# Altium PCB pcb.PcbDoc (part 1 of 2)
Units mm, origin at the board's own origin, x right, y up, seen from the top; angles counter-clockwise.
Board outline 343 x 129 mm, 4 copper layers (Top Layer, Layer 1 3V3, Layer 2 GND, Bottom Layer), stack 1.564 mm thick; 191 components, 119 nets, 712 pads, 390 vias.
Unrouted connection lines stored in the file: 301.
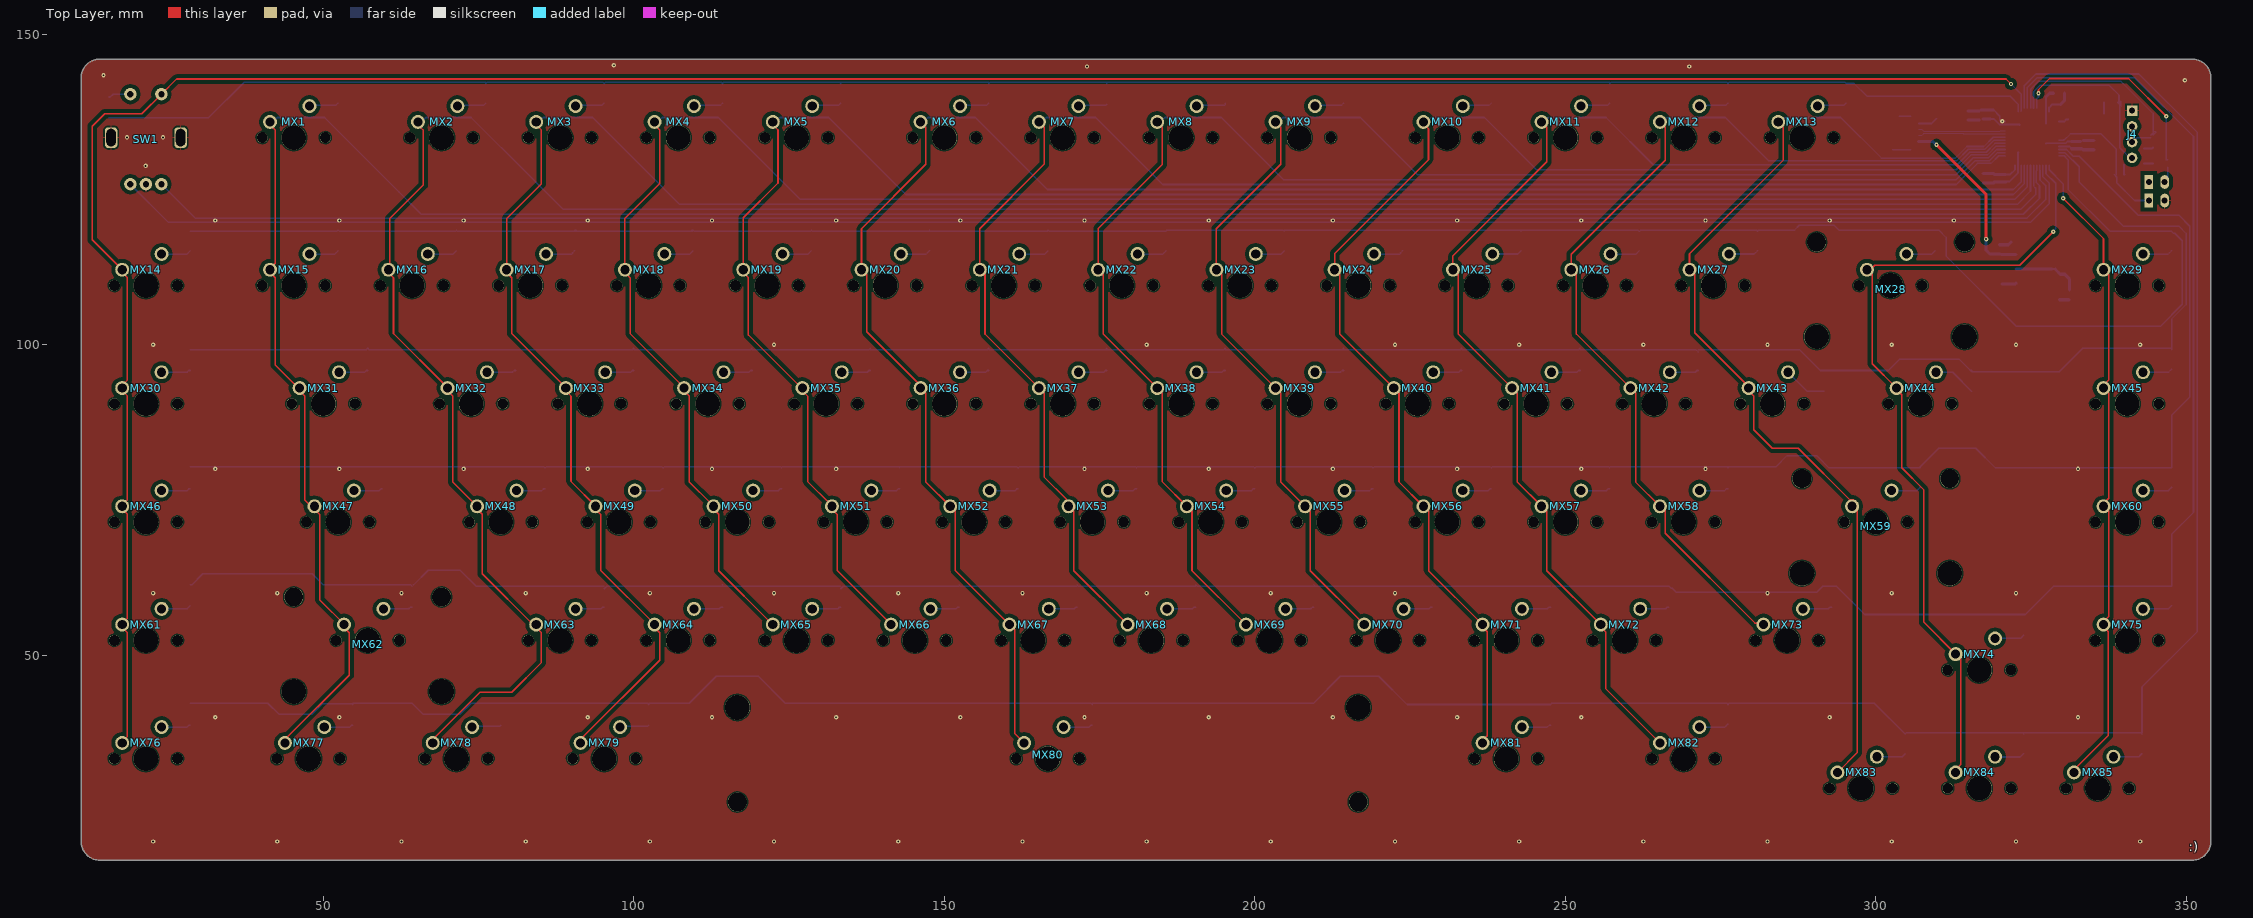
[diagram p0: Top Layer view]
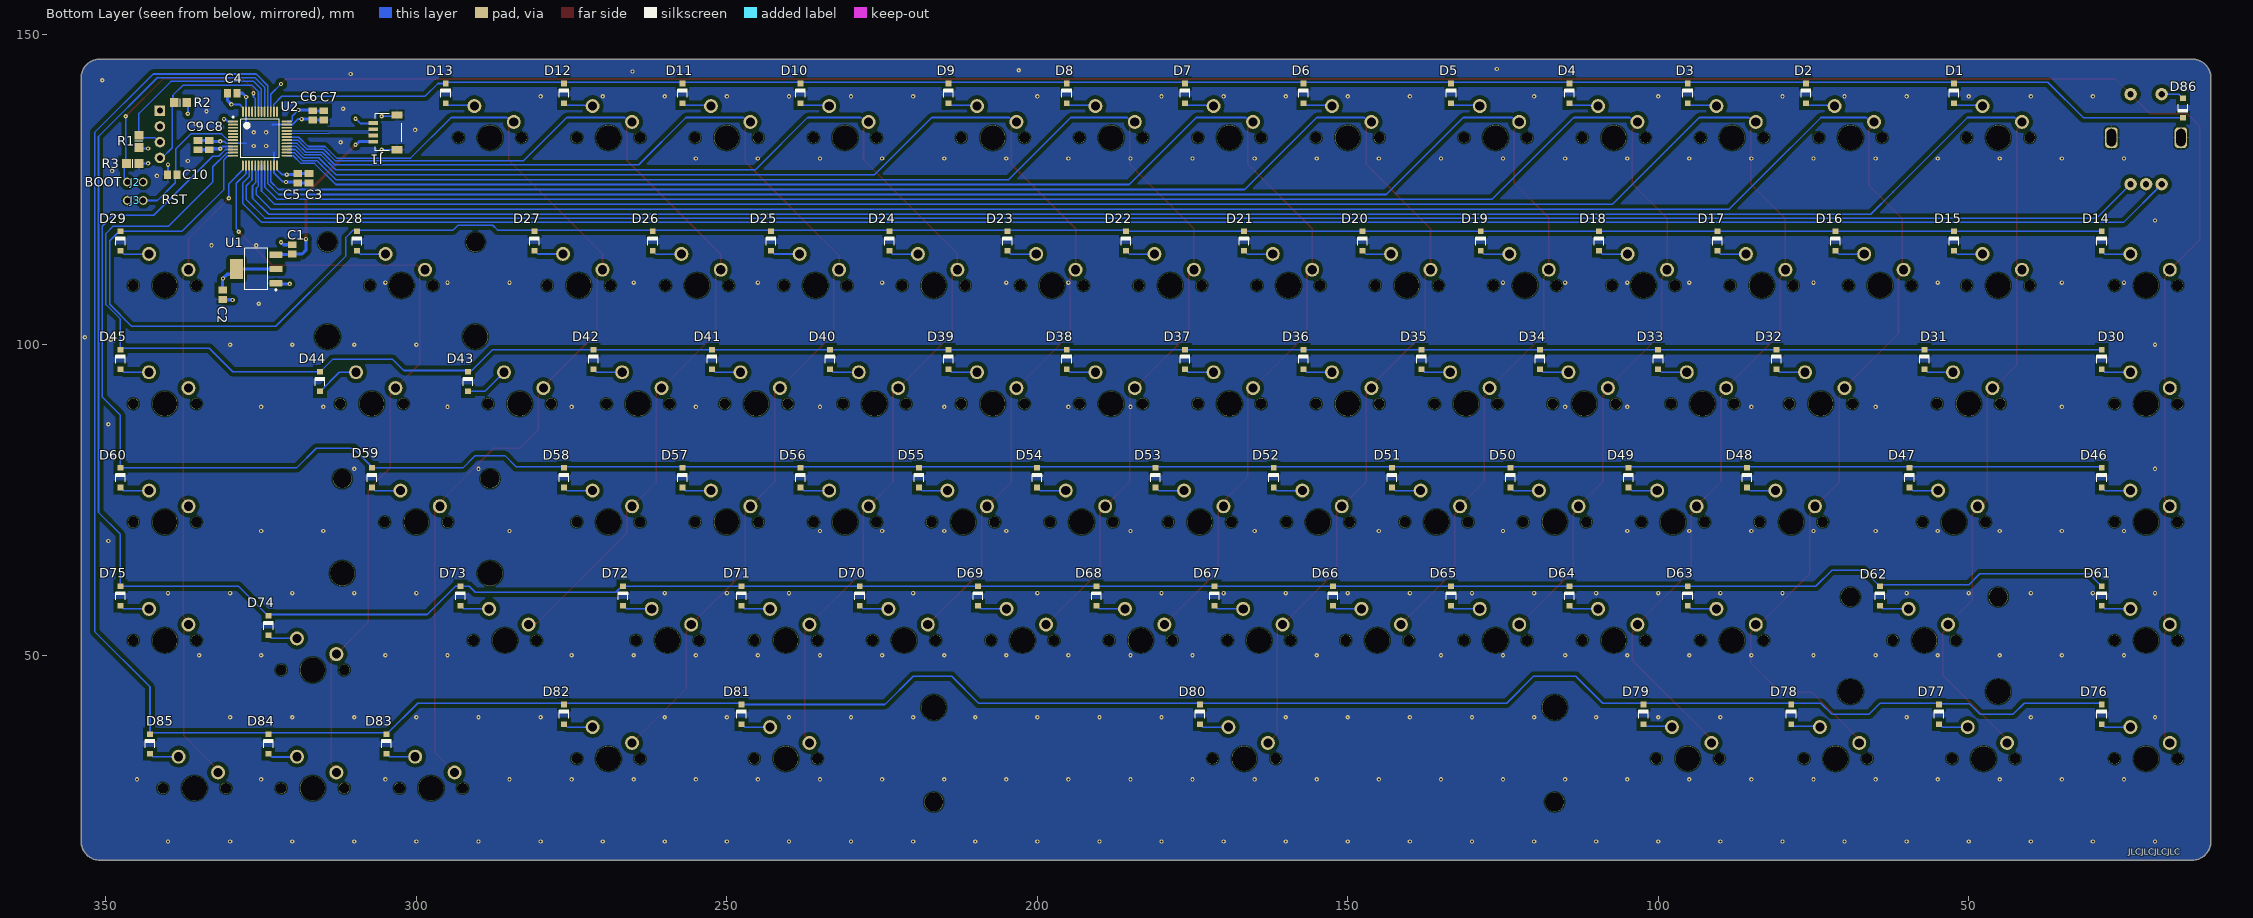
[diagram p1: Bottom Layer view, seen from below]
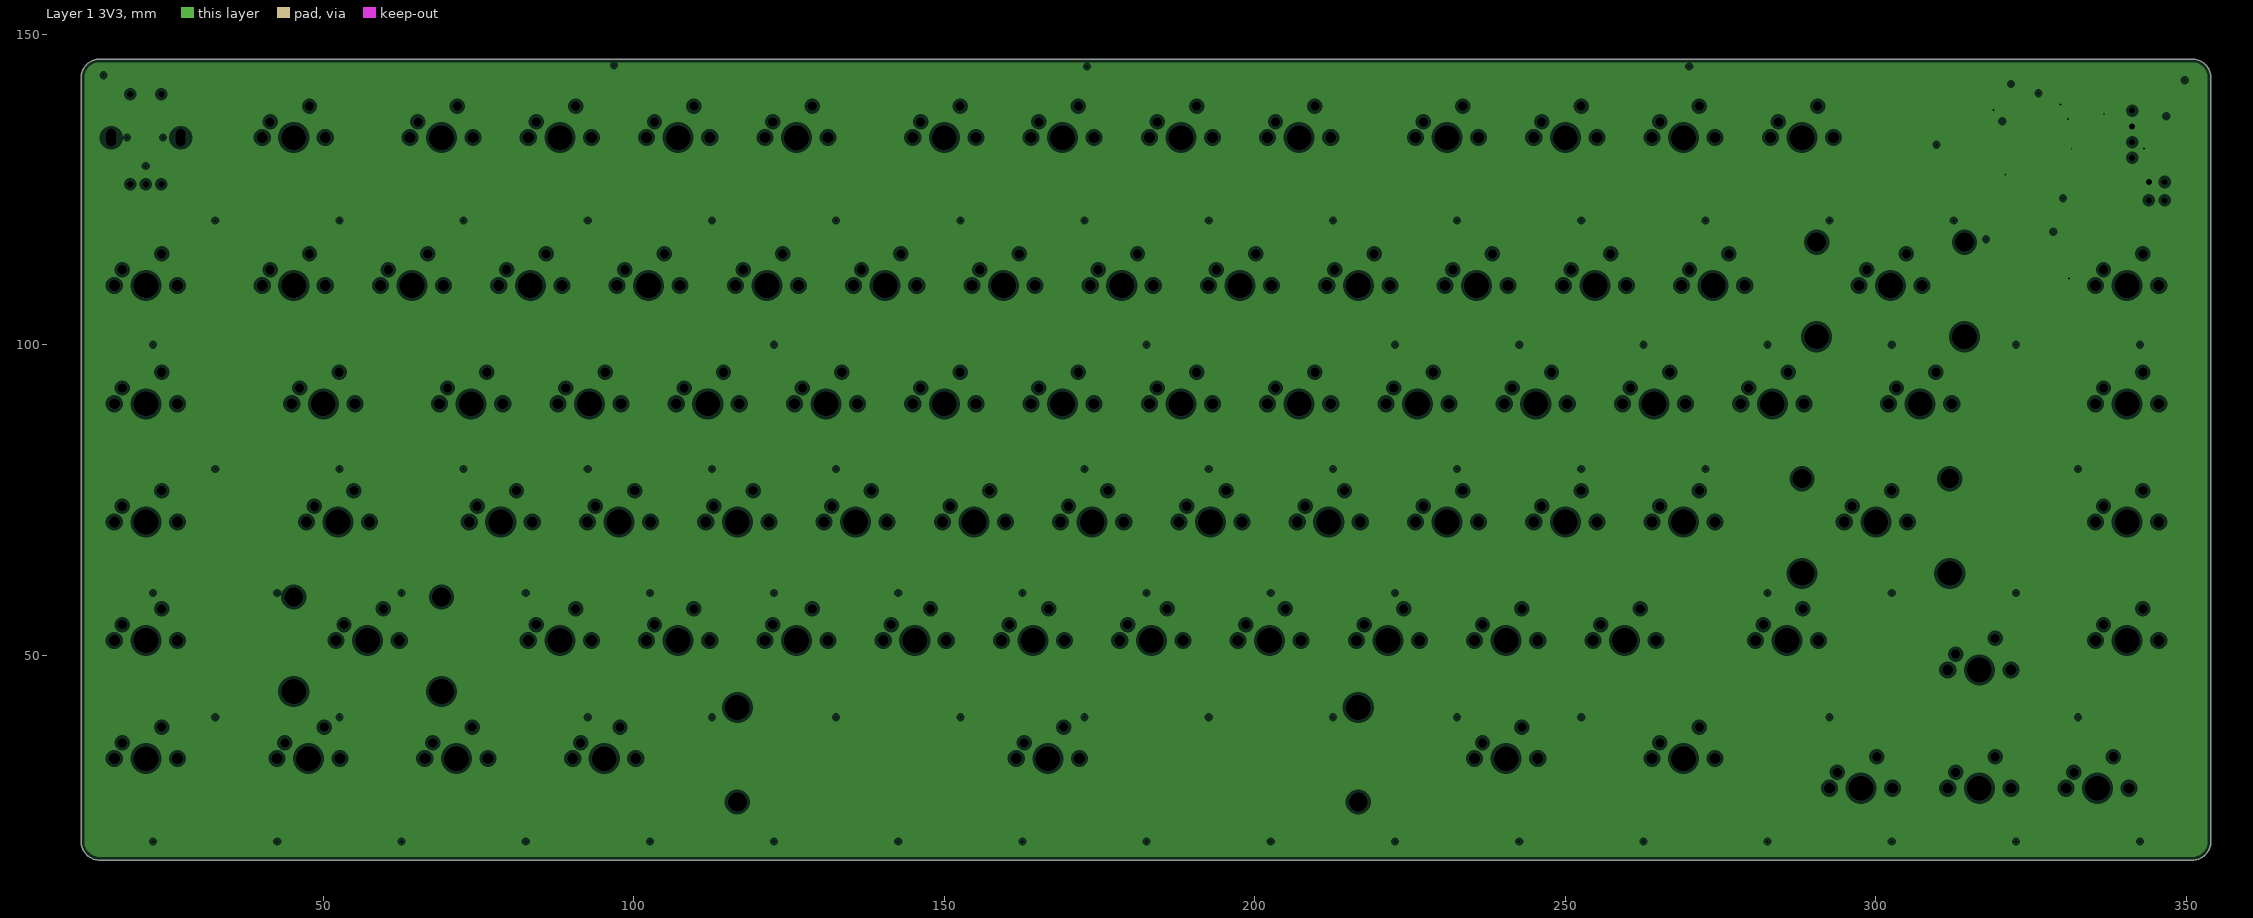
[diagram p2: Layer 1 3V3, clearances drawn from the general rule]
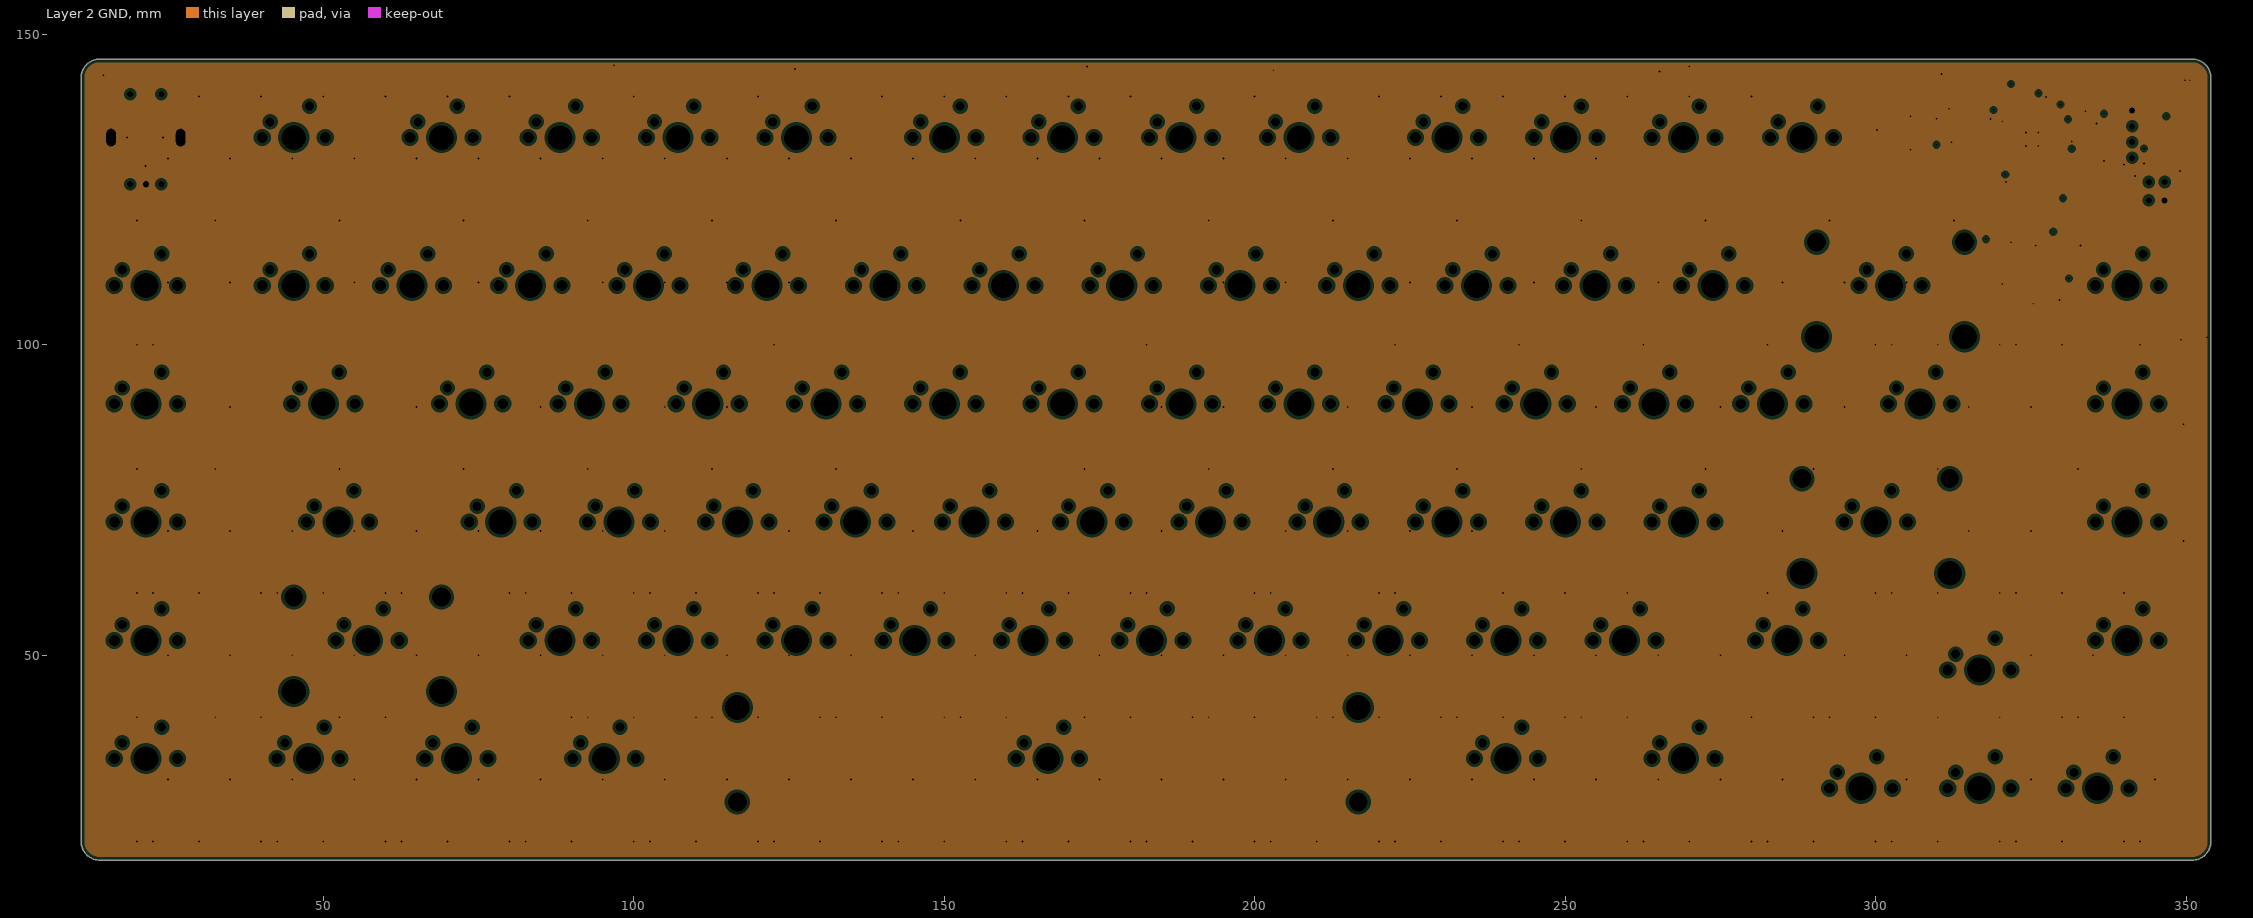
[diagram p3: Layer 2 GND, clearances drawn from the general rule]

## Layer stack, top to bottom
Top Solder: solder mask 0.0102, Solder Resist, Dk 3.5
Top Layer: signal copper 0.035
Dielectric 2: prepreg 0.0994, PP-006, Dk 4.1
Layer 1 3V3: plane copper 0.0152, net +3V3
Dielectric 1: dielectric 1.265, FR-4, Dk 4.8
Layer 2 GND: plane copper 0.0152, net GND
Dielectric 3: prepreg 0.0994, PP-006, Dk 4.1
Bottom Layer: signal copper 0.035
Bottom Solder: solder mask 0.0102, Solder Resist, Dk 3.5

## Board outline
11,20 11,143 cw(c14,143) 14,146 351,146 cw(c351,143) 354,143 354,20 cw(c351,20) 351,17 14,17 cw(c14,20)

## Design rules (kind name [scope] priority, off if disabled: settings)
Clearance "Stitching GND" [IsStitchingVia and InNet('GND') vs (IsVia and (Not IsStitchingVia)) Or IsPad] p1: gap=0.6 ignorepadtopadclearanceinfootprint=FALSE
Clearance Clearance_1 [InNet('USB D_N') vs InNet('USB D_P')] p2: gap=0.1 ignorepadtopadclearanceinfootprint=TRUE
Clearance [All] p3: gap=0.2 ignorepadtopadclearanceinfootprint=TRUE except(0.6: Arc-Fill Arc-Poly Arc-Region Track-Fill Track-Poly Track-Region SMDPad-Fill SMDPad-Poly SMDPad-Region THPad-Fill THPad-Poly THPad-Region Via-Fill Via-Poly Via-Region Fill-Fill Fill-Poly Fill-Region Poly-Poly Poly-Region Region-Region)
ComponentClearance "switch clearance" [(HasFootprint('MXOnly-1U - duplicate') AND HasFootprint('MXOnly-1.25U - duplicate') AND HasFootprint('MXOnly-1.5U - duplicate') AND HasFootprint('MXOnly-1.75U - duplicate') AND HasFootprint('MXOnly-2U - duplicate') AND HasFootprint('MXOnly-2.25U - duplicate') AND HasFootprint('MXOnly-6.25U-ReversedStabilizers - duplicate'))] p1: gap=0 collisioncheckmode=3 verticalgap=0 showdistances=FALSE
ComponentClearance [InComponentClass('Root')] p2: gap=0.254 collisioncheckmode=3 verticalgap=0.254 showdistances=FALSE
DiffPairsRouting [All] p1: maxlimit=0.2 minlimit=0.2 mostfreqgap=0.2 toplayer_minwidth=0.155 toplayer_maxwidth=0.155 toplayer_prefwidth=0.155 bottomlayer_minwidth=0.155 bottomlayer_maxwidth=0.155 bottomlayer_prefwidth=0.155 impedanceprofiledriven=TRUE impedanceprofileid={9E6898E2-0004-47E7-917E-862358624599} impedanceprofilevalue=90.000000 maxuncoupledlength=12.7
HoleSize [All] p1: absolutevalues=TRUE maxlimit=5 minlimit=0.025 maxpercent=80.000 minpercent=20.000
MinimumSolderMaskSliver [All] p1: minsoldermaskwidth=0.13
PlaneClearance [All] p1: clearance=0.508
PlaneConnect [All] p1: pad.planeconnectstyle=Relief pad.reliefexpansion=0.508 pad.reliefentries=4 pad.reliefconductorwidth=0.254 pad.reliefairgap=0.254 via.planeconnectstyle=Direct via.reliefexpansion=0.508 via.reliefentries=4 via.reliefconductorwidth=0.254 via.reliefairgap=0.254
PolygonConnect [All] p1: thpad.connectstyle=Relief thpad.reliefconductorwidth=0.254 thpad.reliefentries=4 thpad.polygonreliefangle="90 Angle" thpad.airgapwidth=0.254 smdpad.connectstyle=Relief smdpad.reliefconductorwidth=0.254 smdpad.reliefentries=4 smdpad.polygonreliefangle="90 Angle" smdpad.airgapwidth=0.254 via.connectstyle=Direct via.reliefconductorwidth=0.254 via.reliefentries=4 via.polygonreliefangle="90 Angle" via.airgapwidth=0.254
RoutingVias [All] p1: holewidth=0.3 width=0.7 viastyle="Through Hole" minholewidth=0.3 minwidth=0.7 maxholewidth=0.3 maxwidth=0.7
SilkToSolderMaskClearance [IsPad] p1: minsilkscreentomaskgap=0.13 clearancetoexposedcopper=TRUE
SolderMaskExpansion viastent [IsVia] p1: expansion=0.102 istentingtop=TRUE
SolderMaskExpansion [All] p2: expansion=0.102 istentingtop=FALSE
SupplyNets "Schematic Supply Nets_2" [InNet('GND')] p1: voltage=0.000
SupplyNets "Schematic Supply Nets_1" [InNet('+3V3')] p2: voltage=0.000
SupplyNets "Schematic Supply Nets" [InNet('+5')] p3: voltage=0.000
Width USB [(InNet('NetJ1_2') OR InNet('NetJ1_3'))] p1: maxlimit=0.165 minlimit=0.165 preferedwidth=0.165 minimp=50.000000 maximp=50.000000 favimp=50.000000
Width 5V [InNet('+5')] p2: maxlimit=0.5 minlimit=0.3 preferedwidth=0.3 minimp=50.000000 maximp=50.000000 favimp=50.000000
Width 3V3 [InNet('+3V3')] p3: maxlimit=0.5 minlimit=0.3 preferedwidth=0.3 minimp=50.000000 maximp=50.000000 favimp=50.000000
Width GND [InNet('GND')] p4: maxlimit=0.5 minlimit=0.3 preferedwidth=0.3 minimp=50.000000 maximp=50.000000 favimp=50.000000
Width [All] p5: maxlimit=0.254 minlimit=0.254 preferedwidth=0.254
23 further rules are at their usual default settings.

## Classes and differential pairs
component class Root: C1 C2 C3 C4 C5 C6 C7 C8 C9 C10 J1 J2 J3 J4 R1 R2 R3 U1 U2
component class Matrix: D1 D2 D3 D4 D5 D6 D7 D8 D9 D10 D11 D12 D13 D14 D15 D16 D17 D18 D19 D20 D21 D22 D23 D24 D25 D26 D27 D28 D29 D30 D31 D32 D33 D34 D35 D36 D37 D38 D39 D40 D41 D42 D43 D44 D45 D46 D47 D48 D49 D50 D51 D52 D53 D54 D55 D56 D57 D58 D59 D60 D61 D62 D63 D64 D65 D66 D67 D68 D69 D70 D71 D72 D73 D74 D75 D76 D77 D78 D79 D80 D81 D82 D83 D84 D85 D86 MX1 MX2 MX3 MX4 MX5 MX6 MX7 MX8 MX9 MX10 MX11 MX12 MX13 MX14 MX15 MX16 MX17 MX18 MX19 MX20 MX21 MX22 MX23 MX24 MX25 MX26 MX27 MX28 MX29 MX30 MX31 MX32 MX33 MX34 MX35 MX36 MX37 MX38 MX39 MX40 MX41 MX42 MX43 MX44 MX45 MX46 MX47 MX48 MX49 MX50 MX51 MX52 MX53 MX54 MX55 MX56 MX57 MX58 MX59 MX60 MX61 MX62 MX63 MX64 MX65 MX66 MX67 MX68 MX69 MX70 MX71 MX72 MX73 MX74 MX75 MX76 MX77 MX78 MX79 MX80 MX81 MX82 MX83 MX84 MX85 SW1
differential pair "USB D": +"USB D_P" -"USB D_N"

## Components (designator, comment, footprint, x,y, rotation, side; value= is the part's Value field where it differs from the comment)
C1 "Cap" C0805 320,115.35 r270 bottom value=1uF
C2 "Cap" C0805 331.2,108.05 r90 bottom value=1uF
C3 "Cap" C0805 317.301,126.801 r90 bottom value=4.7uF
C4 "Cap" C0805 329.648,140.494 r0 bottom value=100nF
C5 "Cap" C0805 319.087,126.801 r90 bottom value=100nF
C6 "Cap" C0805 316.706,136.922 r90 bottom value=100nF
C7 "Cap" C0805 314.92,136.922 r90 bottom value=4.7uF
C8 "Cap" C0805 333.375,132.159 r270 bottom value=10nF
C9 "Cap" C0805 335.161,132.159 r270 bottom value=1uF
C10 "Cap" C0805 339.328,127.397 r180 bottom value=100nF
D1 "1N4148W-7-F" DIOD-SOD123-2_V 52.387,140.494 r90 bottom
D2 "1N4148W-7-F" DIOD-SOD123-2_V 76.2,140.494 r90 bottom
D3 "1N4148W-7-F" DIOD-SOD123-2_V 95.25,140.494 r90 bottom
D4 "1N4148W-7-F" DIOD-SOD123-2_V 114.3,140.494 r90 bottom
D5 "1N4148W-7-F" DIOD-SOD123-2_V 133.35,140.494 r90 bottom
D6 "1N4148W-7-F" DIOD-SOD123-2_V 157.162,140.494 r90 bottom
D7 "1N4148W-7-F" DIOD-SOD123-2_V 176.213,140.494 r90 bottom
D8 "1N4148W-7-F" DIOD-SOD123-2_V 195.262,140.494 r90 bottom
D9 "1N4148W-7-F" DIOD-SOD123-2_V 214.312,140.494 r90 bottom
D10 "1N4148W-7-F" DIOD-SOD123-2_V 238.125,140.494 r90 bottom
D11 "1N4148W-7-F" DIOD-SOD123-2_V 257.175,140.494 r90 bottom
D12 "1N4148W-7-F" DIOD-SOD123-2_V 276.225,140.494 r90 bottom
D13 "1N4148W-7-F" DIOD-SOD123-2_V 295.275,140.494 r90 bottom
D14 "1N4148W-7-F" DIOD-SOD123-2_V 28.575,116.681 r90 bottom
D15 "1N4148W-7-F" DIOD-SOD123-2_V 52.387,116.681 r90 bottom
D16 "1N4148W-7-F" DIOD-SOD123-2_V 71.438,116.681 r90 bottom
D17 "1N4148W-7-F" DIOD-SOD123-2_V 90.487,116.681 r90 bottom
D18 "1N4148W-7-F" DIOD-SOD123-2_V 109.537,116.681 r90 bottom
D19 "1N4148W-7-F" DIOD-SOD123-2_V 128.588,116.681 r90 bottom
D20 "1N4148W-7-F" DIOD-SOD123-2_V 147.637,116.681 r90 bottom
D21 "1N4148W-7-F" DIOD-SOD123-2_V 166.688,116.681 r90 bottom
D22 "1N4148W-7-F" DIOD-SOD123-2_V 185.737,116.681 r90 bottom
D23 "1N4148W-7-F" DIOD-SOD123-2_V 204.787,116.681 r90 bottom
D24 "1N4148W-7-F" DIOD-SOD123-2_V 223.837,116.681 r90 bottom
D25 "1N4148W-7-F" DIOD-SOD123-2_V 242.887,116.681 r90 bottom
D26 "1N4148W-7-F" DIOD-SOD123-2_V 261.938,116.681 r90 bottom
D27 "1N4148W-7-F" DIOD-SOD123-2_V 280.988,116.681 r90 bottom
D28 "1N4148W-7-F" DIOD-SOD123-2_V 309.562,116.681 r90 bottom
D29 "1N4148W-7-F" DIOD-SOD123-2_V 347.662,116.681 r90 bottom
D30 "1N4148W-7-F" DIOD-SOD123-2_V 28.575,97.631 r90 bottom
D31 "1N4148W-7-F" DIOD-SOD123-2_V 57.15,97.631 r90 bottom
D32 "1N4148W-7-F" DIOD-SOD123-2_V 80.962,97.631 r90 bottom
D33 "1N4148W-7-F" DIOD-SOD123-2_V 100.013,97.631 r90 bottom
D34 "1N4148W-7-F" DIOD-SOD123-2_V 119.062,97.631 r90 bottom
D35 "1N4148W-7-F" DIOD-SOD123-2_V 138.112,97.631 r90 bottom
D36 "1N4148W-7-F" DIOD-SOD123-2_V 157.162,97.631 r90 bottom
D37 "1N4148W-7-F" DIOD-SOD123-2_V 176.213,97.631 r90 bottom
D38 "1N4148W-7-F" DIOD-SOD123-2_V 195.262,97.631 r90 bottom
D39 "1N4148W-7-F" DIOD-SOD123-2_V 214.312,97.631 r90 bottom
D40 "1N4148W-7-F" DIOD-SOD123-2_V 233.362,97.631 r90 bottom
D41 "1N4148W-7-F" DIOD-SOD123-2_V 252.412,97.631 r90 bottom
D42 "1N4148W-7-F" DIOD-SOD123-2_V 271.462,97.631 r90 bottom
D43 "1N4148W-7-F" DIOD-SOD123-2_V 291.703,94.059 r90 bottom
D44 "1N4148W-7-F" DIOD-SOD123-2_V 315.516,94.059 r90 bottom
D45 "1N4148W-7-F" DIOD-SOD123-2_V 347.662,97.631 r90 bottom
D46 "1N4148W-7-F" DIOD-SOD123-2_V 28.575,78.581 r90 bottom
D47 "1N4148W-7-F" DIOD-SOD123-2_V 59.531,78.581 r90 bottom
D48 "1N4148W-7-F" DIOD-SOD123-2_V 85.725,78.581 r90 bottom
D49 "1N4148W-7-F" DIOD-SOD123-2_V 104.775,78.581 r90 bottom
D50 "1N4148W-7-F" DIOD-SOD123-2_V 123.825,78.581 r90 bottom
D51 "1N4148W-7-F" DIOD-SOD123-2_V 142.875,78.581 r90 bottom
D52 "1N4148W-7-F" DIOD-SOD123-2_V 161.925,78.581 r90 bottom
D53 "1N4148W-7-F" DIOD-SOD123-2_V 180.975,78.581 r90 bottom
D54 "1N4148W-7-F" DIOD-SOD123-2_V 200.025,78.581 r90 bottom
D55 "1N4148W-7-F" DIOD-SOD123-2_V 219.075,78.581 r90 bottom
D56 "1N4148W-7-F" DIOD-SOD123-2_V 238.125,78.581 r90 bottom
D57 "1N4148W-7-F" DIOD-SOD123-2_V 257.175,78.581 r90 bottom
D58 "1N4148W-7-F" DIOD-SOD123-2_V 276.225,78.581 r90 bottom
D59 "1N4148W-7-F" DIOD-SOD123-2_V 307.181,78.581 r90 bottom
D60 "1N4148W-7-F" DIOD-SOD123-2_V 347.662,78.581 r90 bottom
D61 "1N4148W-7-F" DIOD-SOD123-2_V 28.575,59.531 r90 bottom
D62 "1N4148W-7-F" DIOD-SOD123-2_V 64.294,59.531 r90 bottom
D63 "1N4148W-7-F" DIOD-SOD123-2_V 95.25,59.531 r90 bottom
D64 "1N4148W-7-F" DIOD-SOD123-2_V 114.3,59.531 r90 bottom
D65 "1N4148W-7-F" DIOD-SOD123-2_V 133.35,59.531 r90 bottom
D66 "1N4148W-7-F" DIOD-SOD123-2_V 152.4,59.531 r90 bottom
D67 "1N4148W-7-F" DIOD-SOD123-2_V 171.45,59.531 r90 bottom
D68 "1N4148W-7-F" DIOD-SOD123-2_V 190.5,59.531 r90 bottom
D69 "1N4148W-7-F" DIOD-SOD123-2_V 209.55,59.531 r90 bottom
D70 "1N4148W-7-F" DIOD-SOD123-2_V 228.6,59.531 r90 bottom
D71 "1N4148W-7-F" DIOD-SOD123-2_V 247.65,59.531 r90 bottom
D72 "1N4148W-7-F" DIOD-SOD123-2_V 266.7,59.531 r90 bottom
D73 "1N4148W-7-F" DIOD-SOD123-2_V 292.894,59.531 r90 bottom
D74 "1N4148W-7-F" DIOD-SOD123-2_V 323.85,54.769 r90 bottom
D75 "1N4148W-7-F" DIOD-SOD123-2_V 347.662,59.531 r90 bottom
D76 "1N4148W-7-F" DIOD-SOD123-2_V 28.575,40.481 r90 bottom
D77 "1N4148W-7-F" DIOD-SOD123-2_V 54.769,40.481 r90 bottom
D78 "1N4148W-7-F" DIOD-SOD123-2_V 78.581,40.481 r90 bottom
D79 "1N4148W-7-F" DIOD-SOD123-2_V 102.394,40.481 r90 bottom
D80 "1N4148W-7-F" DIOD-SOD123-2_V 173.831,40.481 r90 bottom
D81 "1N4148W-7-F" DIOD-SOD123-2_V 247.65,40.481 r90 bottom
D82 "1N4148W-7-F" DIOD-SOD123-2_V 276.225,40.481 r90 bottom
D83 "1N4148W-7-F" DIOD-SOD123-2_V 304.8,35.719 r90 bottom
D84 "1N4148W-7-F" DIOD-SOD123-2_V 323.85,35.719 r90 bottom
D85 "1N4148W-7-F" DIOD-SOD123-2_V 342.9,35.719 r90 bottom
D86 "1N4148W-7-F" DIOD-SOD123-2_V 15.478,138.112 r270 bottom
J1 "SM04B-SRSS-TB" JST-SR-4 302.2,134.2 r90 bottom
J2 "BOOT" HDR_F_1X2 345.281,126.206 r0 bottom value=HDRF2
J3 "RST" HDR_F_1X2 345.281,123.23 r0 bottom value=HDRF2
J4 "OLED" SSD1306-0.91-OLED-4PIN-128X32 304.8,139.898 r0 top locked
MX1 "ESC" "MXOnly-1U - duplicate" 45.244,133.35 r0 top value=MX-NoLED
MX2 "F1" "MXOnly-1U - duplicate" 69.056,133.35 r0 top value=MX-NoLED
MX3 "F2" "MXOnly-1U - duplicate" 88.106,133.35 r0 top value=MX-NoLED
MX4 "F3" "MXOnly-1U - duplicate" 107.156,133.35 r0 top value=MX-NoLED
MX5 "F4" "MXOnly-1U - duplicate" 126.206,133.35 r0 top value=MX-NoLED
MX6 "F5" "MXOnly-1U - duplicate" 150.019,133.35 r0 top value=MX-NoLED
MX7 "F6" "MXOnly-1U - duplicate" 169.069,133.35 r0 top value=MX-NoLED
MX8 "F7" "MXOnly-1U - duplicate" 188.119,133.35 r0 top value=MX-NoLED
MX9 "F8" "MXOnly-1U - duplicate" 207.169,133.35 r0 top value=MX-NoLED
MX10 "F9" "MXOnly-1U - duplicate" 230.981,133.35 r0 top value=MX-NoLED
MX11 "F10" "MXOnly-1U - duplicate" 250.031,133.35 r0 top value=MX-NoLED
MX12 "F11" "MXOnly-1U - duplicate" 269.081,133.35 r0 top value=MX-NoLED
MX13 "F12" "MXOnly-1U - duplicate" 288.131,133.35 r0 top value=MX-NoLED
MX14 "MAC1" "MXOnly-1U - duplicate" 21.431,109.537 r0 top value=MX-NoLED
MX15 "~" "MXOnly-1U - duplicate" 45.244,109.537 r0 top value=MX-NoLED
MX16 "1" "MXOnly-1U - duplicate" 64.294,109.537 r0 top value=MX-NoLED
MX17 "2" "MXOnly-1U - duplicate" 83.344,109.537 r0 top value=MX-NoLED
MX18 "3" "MXOnly-1U - duplicate" 102.394,109.537 r0 top value=MX-NoLED
MX19 "4" "MXOnly-1U - duplicate" 121.444,109.537 r0 top value=MX-NoLED
MX20 "5" "MXOnly-1U - duplicate" 140.494,109.537 r0 top value=MX-NoLED
MX21 "6" "MXOnly-1U - duplicate" 159.544,109.537 r0 top value=MX-NoLED
MX22 "7" "MXOnly-1U - duplicate" 178.594,109.537 r0 top value=MX-NoLED
MX23 "8" "MXOnly-1U - duplicate" 197.644,109.537 r0 top value=MX-NoLED
MX24 "9" "MXOnly-1U - duplicate" 216.694,109.537 r0 top value=MX-NoLED
MX25 "0" "MXOnly-1U - duplicate" 235.744,109.537 r0 top value=MX-NoLED
MX26 "-" "MXOnly-1U - duplicate" 254.794,109.537 r0 top value=MX-NoLED
MX27 "" "MXOnly-1U - duplicate" 273.844,109.537 r0 top value=MX-NoLED
MX28 "BACK" "MXOnly-2U - duplicate" 302.419,109.537 r0 top value=MX-NoLED
MX29 "DEL" "MXOnly-1U - duplicate" 340.519,109.537 r0 top value=MX-NoLED
MX30 "MAC2" "MXOnly-1U - duplicate" 21.431,90.487 r0 top value=MX-NoLED
MX31 "TAB" "MXOnly-1.5U - duplicate" 50.006,90.487 r0 top value=MX-NoLED
MX32 "Q" "MXOnly-1U - duplicate" 73.819,90.487 r0 top value=MX-NoLED
MX33 "W" "MXOnly-1U - duplicate" 92.869,90.487 r0 top value=MX-NoLED
MX34 "E" "MXOnly-1U - duplicate" 111.919,90.487 r0 top value=MX-NoLED
MX35 "R" "MXOnly-1U - duplicate" 130.969,90.487 r0 top value=MX-NoLED
MX36 "T" "MXOnly-1U - duplicate" 150.019,90.487 r0 top value=MX-NoLED
MX37 "Y" "MXOnly-1U - duplicate" 169.069,90.487 r0 top value=MX-NoLED
MX38 "U" "MXOnly-1U - duplicate" 188.119,90.487 r0 top value=MX-NoLED
MX39 "I" "MXOnly-1U - duplicate" 207.169,90.487 r0 top value=MX-NoLED
MX40 "O" "MXOnly-1U - duplicate" 226.219,90.487 r0 top value=MX-NoLED
MX41 "P" "MXOnly-1U - duplicate" 245.269,90.487 r0 top value=MX-NoLED
MX42 "[" "MXOnly-1U - duplicate" 264.319,90.487 r0 top value=MX-NoLED
MX43 "]" "MXOnly-1U - duplicate" 283.369,90.487 r0 top value=MX-NoLED
MX44 "\" "MXOnly-1.5U - duplicate" 307.181,90.487 r0 top value=MX-NoLED
MX45 "PGUP" "MXOnly-1U - duplicate" 340.519,90.487 r0 top value=MX-NoLED
MX46 "MAC3" "MXOnly-1U - duplicate" 21.431,71.438 r0 top value=MX-NoLED
MX47 "CAPS" "MXOnly-1.75U - duplicate" 52.387,71.438 r0 top value=MX-NoLED
MX48 "A" "MXOnly-1U - duplicate" 78.581,71.438 r0 top value=MX-NoLED
MX49 "S" "MXOnly-1U - duplicate" 97.631,71.438 r0 top value=MX-NoLED
MX50 "D" "MXOnly-1U - duplicate" 116.681,71.438 r0 top value=MX-NoLED
MX51 "F" "MXOnly-1U - duplicate" 135.731,71.438 r0 top value=MX-NoLED
MX52 "G" "MXOnly-1U - duplicate" 154.781,71.438 r0 top value=MX-NoLED
MX53 "H" "MXOnly-1U - duplicate" 173.831,71.438 r0 top value=MX-NoLED
MX54 "J" "MXOnly-1U - duplicate" 192.881,71.438 r0 top value=MX-NoLED
MX55 "K" "MXOnly-1U - duplicate" 211.931,71.438 r0 top value=MX-NoLED
MX56 "L" "MXOnly-1U - duplicate" 230.981,71.438 r0 top value=MX-NoLED
MX57 ";" "MXOnly-1U - duplicate" 250.031,71.438 r0 top value=MX-NoLED
MX58 "'" "MXOnly-1U - duplicate" 269.081,71.437 r0 top value=MX-NoLED
MX59 "ENTER" "MXOnly-2.25U - duplicate" 300.037,71.438 r0 top value=MX-NoLED
MX60 "PGDN" "MXOnly-1U - duplicate" 340.519,71.438 r0 top value=MX-NoLED
MX61 "MAC4" "MXOnly-1U - duplicate" 21.431,52.387 r0 top value=MX-NoLED
MX62 "LSFT" "MXOnly-2.25U - duplicate" 57.15,52.387 r0 top value=MX-NoLED
MX63 "Z" "MXOnly-1U - duplicate" 88.106,52.387 r0 top value=MX-NoLED
MX64 "X" "MXOnly-1U - duplicate" 107.156,52.387 r0 top value=MX-NoLED
MX65 "C" "MXOnly-1U - duplicate" 126.206,52.387 r0 top value=MX-NoLED
MX66 "V" "MXOnly-1U - duplicate" 145.256,52.387 r0 top value=MX-NoLED
MX67 "B" "MXOnly-1U - duplicate" 164.306,52.387 r0 top value=MX-NoLED
MX68 "N" "MXOnly-1U - duplicate" 183.356,52.387 r0 top value=MX-NoLED
MX69 "M" "MXOnly-1U - duplicate" 202.406,52.387 r0 top value=MX-NoLED
MX70 "," "MXOnly-1U - duplicate" 221.456,52.387 r0 top value=MX-NoLED
MX71 "." "MXOnly-1U - duplicate" 240.506,52.387 r0 top value=MX-NoLED
MX72 "/" "MXOnly-1U - duplicate" 259.556,52.387 r0 top value=MX-NoLED
MX73 "RSFT" "MXOnly-1.75U - duplicate" 285.75,52.387 r0 top value=MX-NoLED
MX74 "UP" "MXOnly-1U - duplicate" 316.706,47.625 r0 top value=MX-NoLED
MX75 "FN" "MXOnly-1U - duplicate" 340.519,52.387 r0 top value=MX-NoLED
MX76 "MAC5" "MXOnly-1U - duplicate" 21.431,33.337 r0 top value=MX-NoLED
MX77 "CTRL" "MXOnly-1.25U - duplicate" 47.625,33.337 r0 top value=MX-NoLED
MX78 "WIN" "MXOnly-1.25U - duplicate" 71.438,33.337 r0 top value=MX-NoLED
MX79 "ALT" "MXOnly-1.25U - duplicate" 95.25,33.337 r0 top value=MX-NoLED
MX80 "SPACE" "MXOnly-6.25U-ReversedStabilizers - duplicate" 166.688,33.337 r0 top value=MX-NoLED
MX81 "ALT" "MXOnly-1.5U - duplicate" 240.506,33.337 r0 top value=MX-NoLED
MX82 "WIN" "MXOnly-1.5U - duplicate" 269.081,33.337 r0 top value=MX-NoLED
MX83 "LEFT" "MXOnly-1U - duplicate" 297.656,28.575 r0 top value=MX-NoLED
MX84 "DOWN" "MXOnly-1U - duplicate" 316.706,28.575 r0 top value=MX-NoLED
MX85 "RIGH" "MXOnly-1U - duplicate" 335.756,28.575 r0 top value=MX-NoLED
R1 "Res2" 6-0805_M 344.686,132.755 r270 bottom value=4.7K
R2 "Res2" 6-0805_M 338,139 r180 bottom value=4.7K
R3 "Res2" 6-0805_M 345.686,129.183 r0 bottom value=4.7K
SW1 "Rotary_Encoder_Switch_Chassis" ROTARYENCODER_ALPS_EC11E-SWITCH_VERTICAL_H20MM 21.431,133.35 r90 top
U1 "TLV1117LV33DCYR" DCY0004A_M 325.8,112.2 r0 bottom
U2 "STM32F072CBT6TR" STM-LQFP48_M 325.198,133.195 r180 bottom

## Footprints (in the part's own frame and the unit in brackets; to place one, negate y for a bottom-side part, rotate by r counter-clockwise, add the part's x,y. Pads: shape width x height; smd on the part's side, far side on the other; paste and mask are expansions set on the pad)
6-0805_M [mm] "Chip Resistor, Body 2.0x1.2mm, IPC Low Density"
  rect 1.4x1.5 smd: 1(-1,0) 2(1,0)
  silkscreen extent 0,-0.65 0,0.65, body extent -1.07,-0.7 1.07,0.7, height 0.7
C0805 [mm] "Chip Capacitor, Body 2.0x1.3mm, IPC High Density"
  rect 1.1x1.4 smd: 1(-0.75,0) 2(0.75,0)
  body extent -1.1,-0.72 1.1,0.72, height 1.4
DCY0004A_M [mm] "SOT223, 4-Leads, Body 6.7x3.7mm, Pitch 2.3mm, IPC Low Density"
  rrect10% 2.05x1 smd: 1(-3.175,2.3) 2(-3.175,0) 3(-3.175,-2.3)
  rrect5% 2.05x3.25 smd: 4(3.175,0)
  silkscreen extent -3.3,-3.35 1.85,3.47, body extent -3.5,-3.25 3.5,3.25, height 1.62
DIOD-SOD123-2_V [mm] "SOD123, 2-Leads, Body 2.7x1.55mm, Height 1.45mm"
  rect 0.9x0.95 smd: 1(-1.575,0) 2(1.575,0)
  silkscreen extent -0.64,-0.83 0.64,0.77, body extent -1.35,-0.77 1.35,0.77, height 1.45
HDR_F_1X2 [mm] "HEADER FEMALE pitch: 2.54mm"
  round 1.4 / inner round 1.4 / far side rect 1.4x2.2 hole 1 mask+0.1: 1(-1.27,0)
  round 1.4 / inner round 1.4 / far side oval 1.4x2.2 hole 1 mask+0.1: 2(1.27,0)
  body extent -2.66,-1.3 2.67,1.2, height 8.5
JST-SR-4 [mm]
  rect 0.6x1.55 smd: 1(-1.5,4.775) 2(-0.5,4.775) 3(0.5,4.775) 4(1.5,4.775)
  rect 1.2x1.8 smd: 5(-2.8,0.9) 6(2.8,0.9)
  silkscreen extent -3,0.2 3,4.4
"MXOnly-1.5U - duplicate" [mm]
  round 2.25 hole 1.47: 1(-3.81,2.54) 2(2.54,5.08)
  round 1.75 hole 1.75: Un1(5.08,0) Un2(-5.08,0)
  round 3.988 hole 3.988: Un3(0,0)
"MXOnly-1.25U - duplicate" [mm]
  round 2.25 hole 1.47: 1(-3.81,2.54) 2(2.54,5.08)
  round 1.75 hole 1.75: Un1(5.08,0) Un2(-5.08,0)
  round 3.988 hole 3.988: Un3(0,0)
"MXOnly-1.75U - duplicate" [mm]
  round 2.25 hole 1.47: 1(-3.81,2.54) 2(2.54,5.08)
  round 1.75 hole 1.75: Un1(5.08,0) Un2(-5.08,0)
  round 3.988 hole 3.988: Un3(0,0)
"MXOnly-1U - duplicate" [mm]
  round 2.25 hole 1.47: 1(-3.81,2.54) 2(2.54,5.08)
  round 1.75 hole 1.75: Un1(5.08,0) Un2(-5.08,0)
  round 3.988 hole 3.988: Un3(0,0)
"MXOnly-2.25U - duplicate" [mil]
  round 88.58 hole 57.87: 1(-150,100) 2(100,200)
  round 157 hole 157: Un1(468.75,-325) Un2(-468.75,-325) Un7(0,0)
  round 120 hole 120: Un3(468.75,275) Un4(-468.75,275)
  round 68.9 hole 68.9: Un5(200,0) Un6(-200,0)
"MXOnly-2U - duplicate" [mil]
  round 88.58 hole 57.87: 1(-150,100) 2(100,200)
  round 157 hole 157: Un1(468.75,-325) Un2(-468.75,-325) Un7(0,0)
  round 120 hole 120: Un3(468.75,275) Un4(-468.75,275)
  round 68.9 hole 68.9: Un5(200,0) Un6(-200,0)
"MXOnly-6.25U-ReversedStabilizers - duplicate" [mil]
  round 88.58 hole 57.87: 1(-150,100) 2(100,200)
  round 157 hole 157: Un1(1968.5,325) Un2(-1968.5,325) Un7(0,0)
  round 120 hole 120: Un3(1968.5,-275) Un4(-1968.5,-275)
  round 68.9 hole 68.9: Un5(200,0) Un6(-200,0)
ROTARYENCODER_ALPS_EC11E-SWITCH_VERTICAL_H20MM [mm]
  round 2 hole 1: A(-7.5,2.5) B(-7.5,-2.5) C(-7.5,0) S1(7,-2.5) S2(7,2.5)
  rrect50% 3.3x2 hole 1.5 slot 2.8 at 0 deg: C(0,5.6) C(0,-5.6)
SSD1306-0.91-OLED-4PIN-128X32 [mm]
  rect 1.7x1.7 hole 1: 1(36.5,-2.19)
  rrect100% 1.7x1.7 hole 1: 2(36.5,-4.73) 3(36.5,-7.27) 4(36.5,-9.81)
STM-LQFP48_M [mm] "QFP, 48-Leads, Body 7x7mm, Pitch 0.5mm, IPC Low Density"
  oval 1.65x0.3 smd: 1(-4.325,2.75) 2(-4.325,2.25) 3(-4.325,1.75) 4(-4.325,1.25) 5(-4.325,0.75) 6(-4.325,0.25) 7(-4.325,-0.25) 8(-4.325,-0.75) 9(-4.325,-1.25) 10(-4.325,-1.75) 11(-4.325,-2.25) 12(-4.325,-2.75) 25(4.325,-2.75) 26(4.325,-2.25) 27(4.325,-1.75) 28(4.325,-1.25) 29(4.325,-0.75) 30(4.325,-0.25) 31(4.325,0.25) 32(4.325,0.75) 33(4.325,1.25) 34(4.325,1.75) 35(4.325,2.25) 36(4.325,2.75)
  oval 0.3x1.65 smd: 13(-2.75,-4.325) 14(-2.25,-4.325) 15(-1.75,-4.325) 16(-1.25,-4.325) 17(-0.75,-4.325) 18(-0.25,-4.325) 19(0.25,-4.325) 20(0.75,-4.325) 21(1.25,-4.325) 22(1.75,-4.325) 23(2.25,-4.325) 24(2.75,-4.325) 37(2.75,4.325) 38(2.25,4.325) 39(1.75,4.325) 40(1.25,4.325) 41(0.75,4.325) 42(0.25,4.325) 43(-0.25,4.325) 44(-0.75,4.325) 45(-1.25,4.325) 46(-1.75,4.325) 47(-2.25,4.325) 48(-2.75,4.325)
  silkscreen extent -4.45,-3.1 3.1,3.57, body extent -3.5,-3.5 3.5,3.5, height 1.6

## Part data
C1 C2 C3 C4 C5 C6 C7 C8 C9 C10: "Capacitor", LatestRevisionDate=17-Jul-2002, LatestRevisionNote="Re-released for DXP Platform.", PackageDescription="Radial Cap, Thru-Hole; 2 Leads; 0.3 in Pin Spacing", PackageReference=RAD-0.3, Published=8-Jun-2000, Publisher="Altium Limited"
D1 D2 D3 D4 D5 D6 D7 D8 D9 D10 D11 D12 D13 D14 D15 D16 D17 D18 D19 D20 D21 D22 D23 D24 D25 D26 D27 D28 D29 D30 D31 D32 D33 D34 D35 D36 D37 D38 D39 D40 D41 D42 D43 D44 D45 D46 D47 D48 D49 D50 D51 D52 D53 D54 D55 D56 D57 D58 D59 D60 D61 D62 D63 D64 D65 D66 D67 D68 D69 D70 D71 D72 D73 D74 D75 D76 D77 D78 D79 D80 D81 D82 D83 D84 D85 D86: library part CMP-004-00033-1, "Rectifier Diode, 1 Phase, 1 Element, 0.15A, 100V V(RRM), Silicon", Forward Voltage=715mV, Max Operating Temperature=150°C, Max Output current=150mA, Max Power Dissipation=400mW, Min Operating Temperature=-65°C, Non-rep Pk Forward Current-Max=1A, Package Body Material=Plastic, Package Shape=Rectangular, Package Style="SMALL OUTLINEMeter", Peak Reflow Temperature (Cel)=260°C, Rep Pk Reverse Voltage-Max=100V, Time @ Peak Reflow Temperature-Max (s)=40s, Additional Feature="HIGH RELIABILITY", Diode Element Material=SILICON, Diode Type=RECTIFIER, JESD-30 Code=R-PDSO-G2, JESD-609 Code=e3, Moisture Sensitivity Level=1, Number of Elements=1, Pins=2, Qualification Status="Not Qualified", Reach SVHC Compliant=Yes, Reverse Recovery Time-Max=0.004us, RoHS Compliant=Yes, Surface Mount=Yes, Terminal Finish=Tin, Terminal Form="Gull Wing", Terminal Position=DUAL
J1: "No Description Available", Mfr_Name=JST, RefDes=RefDes, Type=Type
J2 J3: library part CMP-002-00129-4, Component Type=Standard, Design Item ID=HDR_F_1X2, Pins=2, Source="Conn Header.SchLib"
J4: library part CMP-002-00072-5, "4 pin header"
MX1 MX2 MX3 MX4 MX5 MX6 MX7 MX8 MX9 MX10 MX11 MX12 MX13 MX14 MX15 MX16 MX17 MX18 MX19 MX20 MX21 MX22 MX23 MX24 MX25 MX26 MX27 MX28 MX29 MX30 MX31 MX32 MX33 MX34 MX35 MX36 MX37 MX38 MX39 MX40 MX41 MX42 MX43 MX44 MX45 MX46 MX47 MX48 MX49 MX50 MX51 MX52 MX53 MX54 MX55 MX56 MX57 MX58 MX59 MX60 MX61 MX62 MX63 MX64 MX65 MX66 MX67 MX68 MX69 MX70 MX71 MX72 MX73 MX74 MX75 MX76 MX77 MX78 MX79 MX80 MX81 MX82 MX83 MX84 MX85: library part MX-NoLED
R1 R2 R3: "Resistor", LatestRevisionDate=17-Jul-2002, LatestRevisionNote="Re-released for DXP Platform.", PackageDescription="Axial Device, Thru-Hole; 2 Leads; 0.4 in Pin Spacing", PackageReference=AXIAL-0.4, Published=8-Jun-2000, Publisher="Altium Limited"
U1: library part CMP-0395-00503-2, "Single Output LDO, 1 A, Fixed 3.3 V Output, 2 to 5.5 V Input, 4-pin SOT-223 (DCY), -40 to 125 degC, Green (RoHS & no Sb/Br)", Manufacturer="Texas Instruments", Accuracy(%)=2, Code_JEDEC=TO-261, ComponentLink1Description="Manufacturer URL", ComponentLink1URL=http://www.ti.com/, ComponentLink2Description=Datasheet, ComponentLink2URL=http://www.ti.com/general/docs/lit/getliterature.tsp?genericPartNumber=TLV1117LV33&fileType=pdf, ComponentLink3Description="Package Specification", ComponentLink3URL=http://www.ti.com/litv/pdf/mpds094a, DatasheetVersion=SBVS160A, Eco-Plan="Green (RoHS & no Sb/Br)", Fixed Output Options(V)=3.3, Iout(Max)(A)=1, Iq(Typ)(mA)=0.05, Mounting Technology="Surface Mount", PackageDescription="4-Pin Plastic Small Outline, Body 3.5 x 6.5 mm, Pitch 2.3 mm", PackageReference=DCY0004A, PackageVersion=4202506/B, PartNumber=TLV1117LV33DCYR, SubFamily="Single Channel LDO", Vdo(Typ)(mV)=1200, Vin(Max)(V)=5.5, Vin(Min)(V)=2, Vout Adj(Max)(V)=3.3, Vout Adj(Min)(V)=3.3
U2: library part CMP-0304-00171-1, "ARM Cortex-M0 32-bit MCU, 128 KB Flash, 16 KB Internal RAM, 37 I/Os, 48-Pin LQFP, -40 to 85 degC, Tape and Reel", I/Os (High Current)=37, Operating Frequency(F) (Processor speed) (MHz)=48, Package Description="48-Pin Low Profile Quad Flat Package, Body 7 x 7 mm, Pitch 0.5 mm", Package Reference=LQFP48, Supply Voltage(Vcc) min (V)=2, ComponentLink1Description="Manufacturer URL", ComponentLink1URL=http://www.st.com/, ComponentLink2Description=Datasheet, ComponentLink2URL=http://www.st.com/st-web-ui/static/active/en/resource/technical/document/datasheet/DM00090510.pdf, Core="ARM Cortex-M0", D/A Converter=1, DatasheetVersion="Rev. 5", FLASH Size (Prog) (kB)=128, Internal RAM Size (kB)=16, Mounting Technology="Surface Mount", Packing="Tape and Reel"

## Via types
v1: diameter 0.7, hole 0.3, Layer 2 GND to Bottom Layer, tented both sides, 284 vias
v2: diameter 0.7, hole 0.3, Top Layer to Layer 2 GND, tented both sides, 91 vias
v3: diameter 0.7, hole 0.3, Layer 1 3V3 to Bottom Layer, tented both sides, 8 vias
v4: diameter 0.7, hole 0.3, Top Layer to Bottom Layer, tented both sides, 7 vias

## Nets (pads, with @x,y where several pads share a name; then routed paths per layer and width w, separated by ;. In a path a pad name is that pad's centre, name@x,y a point inside that pad or via, vN(x,y) a via of type N, cw(c..) or ccw(c..) an arc to the next point about the centre after c; other vN are vias at no path point)
+3V3: C2.2 C3.2 C4.2 C5.2 C6.2 C7.2 C8.2 C9.2 J2.1 J4.2 R1.2 R2.2 U1.2 U1.4 U2.1 U2.9 U2.24 U2.36 U2.48 | length 40
  Bottom Layer w0.3: C6.2@316.706,137.517 C6.2@316.989,137.8 ; v3(319,137.8) 320,136.8 320,136.143 320.198,135.945 U2.36@320.873,135.945 ; v3(320.873,127.397) 320.897,127.42 321.673,127.42 322.448,128.195 U2.24@322.448,128.87 ; U2.48@327.948,137.52 327.948,138.195 328.461,138.708 v3(329.803,138.708) ; U1.4@328.386,112.214 328.4,112.2 U1.4@328.8,112.2 ; U2.9@329.523,131.945 330.198,131.945 331.208,131.945 v3(331.589,131.564) ; U2.1@329.523,135.945 330.345,135.945 330.65,136.25 330.917,136.25 v3(330.993,136.326) ; C8.2@333.22,131.564 C8.2@333.375,131.409 ; v3(336.8,137.2) R2.2@336.8,139 ; v3(343.2,131.6) 344.531,131.6 R1.2@344.686,131.755
  Bottom Layer w0.5: C7.2@314.92,137.672 C6.2@316.706,137.672 ; C6.2@316.989,137.8 v3(319,137.8) ; C3.2@317.301,127.551 C5.2@319.087,127.551 ; C5.2@319.087,127.397 v3(320.873,127.397) ; U1.2@322.659,112.214 U1.4@328.386,112.214 ; U1.4@328.975,112.2 328.975,112.118 329.75,111.343 330.457,111.343 v3@331.2,110.6 ; v3(329.803,138.708) 330.398,139.303 C4.2@330.398,140.494 ; v3(331.138,110.659) 331.138,110.605 331.2,110.543 C2.2@331.2,108.8 ; v3(331.589,131.564) C8.2@333.22,131.564 ; C8.2@333.375,131.409 C9.2@335.161,131.409
+5: C1.2 J1.1 U1.3 | length 28.2
  Top Layer w0.5: v4(309.8,132.2) 317.8,124.2 v4(317.8,117)
  Bottom Layer w0.5: J1.1@306.898,132.7 309.246,132.7 309.746,132.2 v4(309.8,132.2) ; v4(317.8,117) 317.8,115.2 318.4,114.6 C1.2@320,114.6 ; C1.2@320.3,114.5 U1.3@322.625,114.5
GND: C1.1 C2.1 C3.1 C4.1 C5.1 C6.1 C7.1 C8.1 C9.1 C10.1 J1.4 J1.5 J1.6 J3.2 J4.1 R3.1 SW1.C U1.1 U2.8 U2.23 U2.35 U2.47 | length 47.7
  Bottom Layer w0.3: J1.5@302.8,131.4 v1(305.6,131.4) ; J1.6@303.8,136.8 v1(305.6,136.8) ; J1.4@307,135.6 309,135.6 v1(309.8,136.4) ; v1(318.492,136.326) 319.087,136.326 319.968,135.445 U2.35@320.873,135.445 323.155,135.445 323.2,135.4 ; v1(321,126.2) 321.077,126.277 321.539,126.277 322.948,127.686 U2.23@322.948,128.87 322.948,130.948 323,131 ; 327.4,132.4 327.445,132.445 U2.8@329.523,132.445 330.645,132.445 330.955,132.755 331.555,132.755 v1@331.6,132.8 ; 327.4,135.6 327.448,135.648 U2.47@327.448,137.52 327.448,139.872 v1(327.422,139.898) ; C2.1@331.138,107.238 C2.1@331.2,107.3 ; C8.1@332.955,132.755 C8.1@333,132.8 ; v1(340,129) 340,127.475 C10.1@340.078,127.397 ; v1(343.2,129.2) 344.668,129.2 R3.1@344.686,129.183
  Bottom Layer w0.5: C7.1@314.92,136.172 C6.1@316.706,136.172 ; C3.1@317.301,126.051 C5.1@319.087,126.051 ; C6.1@317.301,136.326 v1(318.492,136.326) ; C5.1@319.093,126.2 v1(321,126.2) ; C1.1@320,116.1 321.4,116.1 v1(321.8,116.5) ; v1(320.4,109.8) 322.525,109.8 U1.1@322.625,109.9 ; v1(327.422,139.898) 328.017,140.494 C4.1@328.612,140.494 ; v1(329.6,107.2) 329.638,107.238 C2.1@331.137,107.238 ; v1(331.589,132.755) C8.1@332.955,132.755 ; C8.1@333.375,132.909 C9.1@335.161,132.909
  other v1: 20,20 30,20 40,20 50,20 60,20 70,20 80,20 90,20 100,20 110,20 120,20 130,20 140,20 150,20 160,20 170,20 180,20 190,20 200,20 210,20 220,20 230,20 240,20 250,20 260,20 270,20 280,20 290,20 300,20 310,20 320,20 330,20 340,20 25,30 35,30 45,30 55,30 65,30 75,30 85,30 95,30 105,30 115,30 125,30 135,30 145,30 155,30 165,30 175,30 185,30 195,30 205,30 215,30 225,30 235,30 245,30 255,30 265,30 275,30 285,30 305,30 325,30 345,30 20,40 40,40 60,40 90,40 100,40 110,40 120,40 130,40 140,40 150,40 160,40 180,40 190,40 200,40 210,40 220,40 230,40 240,40 250,40 260,40 280,40 290,40 300,40 310,40 320,40 330,40 340,40 25,50 35,50 45,50 55,50 65,50 75,50 85,50 95,50 105,50 115,50 125,50 135,50 155,50 175,50 185,50 195,50 205,50 215,50 225,50 235,50 245,50 255,50 265,50 275,50 295,50 305,50 325,50 335,50 20,60 30,60 40,60 50,60 60,60 80,60 90,60 100,60 110,60 120,60 130,60 140,60 150,60 160,60 170,60 180,60 200,60 220,60 240,60 250,60 260,60 300,60 310,60 320,60 330,60 340,60 349.6,68.4 25,70 35,70 45,70 55,70 65,70 75,70 85,70 95,70 105,70 125,70 145,70 165,70 185,70 205,70 215,70 225,70 235,70 285,70 315,70 325,70 20,80 290,80 310,80 349.6,87.2 35,90 65,90 85,90 105,90 115,90 185,90 195,90 215,90 235,90 255,90 275,90 295,90 315,90 325,90 20,100 300,100 310,100 320,100 330,100 349.2,100.8 353.4,101.2 325.4,106.6 25,110 35,110 55,110 75,110 95,110 105,110 115,110 125,110 195,110 205,110 225,110 245,110 265,110 285,110 295,110 305,110 325.8,116 333,116 20,120 341.8,127.2 349,128 336.8,129.6 25,130 35,130 45,130 55,130 65,130 75,130 85,130 95,130 105,130 115,130 125,130 135,130 145,130 155,130 165,130 175,130 185,130 195,130 205,130 215,130 225,130 235,130 245,130 255,130 324.2,132 326.2,132 312.2,132.6 324.2,134.2 326.2,134.2 300.2,134.6 335.6,135.6 333.8,137.6 311.8,138 30,140 40,140 50,140 60,140 70,140 80,140 100,140 120,140 140,140 150,140 160,140 170,140 180,140 200,140 220,140 230,140 240,140 250,140 260,140 270,140 280,140 350.6,142.6 310.6,143.6 265.2,144 203,144.2 126,144.4
  other v2: 22.6,20 42.6,20 62.6,20 82.6,20 102.6,20 122.6,20 142.6,20 162.6,20 182.6,20 202.6,20 222.6,20 242.6,20 262.6,20 282.6,20 302.6,20 322.6,20 342.6,20 32.6,40 52.6,40 92.6,40 112.6,40 132.6,40 152.6,40 172.6,40 192.6,40 212.6,40 232.6,40 252.6,40 292.6,40 332.6,40 22.6,60 42.6,60 62.6,60 82.6,60 102.6,60 122.6,60 142.6,60 162.6,60 182.6,60 202.6,60 222.6,60 282.6,60 302.6,60 322.6,60 32.6,80 52.6,80 72.6,80 92.6,80 112.6,80 132.6,80 172.6,80 192.6,80 212.6,80 232.6,80 252.6,80 272.6,80 332.6,80 22.6,100 122.6,100 182.6,100 222.6,100 242.6,100 262.6,100 282.6,100 302.6,100 322.6,100 342.6,100 32.6,120 52.6,120 72.6,120 92.6,120 112.6,120 132.6,120 152.6,120 172.6,120 192.6,120 212.6,120 232.6,120 252.6,120 272.6,120 292.6,120 312.6,120 21.4,128.8 18.4,133.4 24.2,133.4 320.4,136 349.8,142.6 14.6,143.4 173,144.8 270,144.8 96.8,145
NetC10_2: C10.2 J3.1 U2.7 | length 22.6
  Bottom Layer w0.254: U2.7@329.523,132.945 330.211,132.945 330.234,132.968 330.396,132.968 331.373,133.945 336.351,133.945 338.733,131.564 C10.2@338.733,127.397 ; C10.2@338.423,127.397 338.846,126.974 338.846,126.093 341.709,123.23 J3.1@344.011,123.23
NetD1_1: D1.1 MX1.2 | length 4.3
  Bottom Layer w0.254: MX1.2@48.22,138.708 48.332,138.596 52.064,138.596 D1.1@52.387,138.919
NetD1_2: D1.2 D2.2 D3.2 D4.2 D5.2 D6.2 D7.2 D8.2 D9.2 D10.2 D11.2 D12.2 D13.2 D86.2 U2.38 | length 313.9
  Bottom Layer w0.254: D86.2@15.478,136.537 31.533,136.537 37.275,142.28 D2.2@76.2,142.28 ; D2.2@76.2,142.069 76.411,142.28 95.039,142.28 D3.2@95.25,142.069 95.461,142.28 114.089,142.28 D4.2@114.3,142.069 114.511,142.28 D5.2@133.139,142.28 ; D5.2@133.35,142.069 D5.2@133.139,142.28 ; D6.2@157.163,142.069 157.373,142.28 D7.2@176.002,142.28 ; D6.2@157.162,142.28 D5.2@133.139,142.28 ; D7.2@176.213,142.069 D7.2@176.002,142.28 ; D11.2@257.175,142.069 257.386,142.28 276.014,142.28 D12.2@276.225,142.069 276.436,142.28 295.064,142.28 D13.2@295.275,142.069 296.531,142.069 298.6,140 321.696,140 322.948,138.748 U2.38@322.948,137.52 ; D11.2@257.175,142.28 D7.2@176.002,142.28
NetD2_1: D2.1 MX2.2 | length 5.7
  Bottom Layer w0.254: MX2.2@70.842,138.112 71.325,138.596 75.877,138.596 D2.1@76.2,138.919
NetD3_1: D3.1 MX3.2 | length 5.1
  Bottom Layer w0.254: MX3.2@90.487,138.112 90.971,138.596 94.927,138.596 D3.1@95.25,138.919
NetD4_1: D4.1 MX4.2 | length 4.3
  Bottom Layer w0.254: MX4.2@110.133,138.708 110.245,138.596 113.977,138.596 D4.1@114.3,138.919
NetD5_1: D5.1 MX5.2 | length 4.9
  Bottom Layer w0.254: MX5.2@128.587,138.708 128.699,138.596 133.027,138.596 D5.1@133.35,138.919
NetD6_1: D6.1 MX6.2 | length 5.1
  Bottom Layer w0.254: MX6.2@152.4,138.112 152.883,138.596 156.839,138.596 D6.1@157.162,138.919
NetD7_1: D7.1 MX7.2 | length 4.7
  Bottom Layer w0.254: MX7.2@171.609,138.43 171.774,138.596 176.1,138.596 D7.1@176.212,138.708
NetD8_1: D8.1 MX8.2 | length 5.2
  Bottom Layer w0.254: MX8.2@190.5,138.112 190.983,138.596 195.15,138.596 195.262,138.708 D8.1@195.262,138.919
NetD9_1: D9.1 MX9.2 | length 5.5
  Bottom Layer w0.254: MX9.2@208.955,138.708 209.066,138.596 213.989,138.596 D9.1@214.312,138.919
NetD10_1: D10.1 MX10.2 | length 5.7
  Bottom Layer w0.254: MX10.2@232.767,138.112 233.25,138.596 237.802,138.596 D10.1@238.125,138.919
NetD11_1: D11.1 MX11.2 | length 5.1
  Bottom Layer w0.254: MX11.2@252.412,138.112 252.896,138.596 256.852,138.596 D11.1@257.175,138.919
NetD12_1: D12.1 MX12.2 | length 5.7
  Bottom Layer w0.254: MX12.2@270.867,138.112 271.35,138.596 275.902,138.596 D12.1@276.225,138.919
NetD13_1: D13.1 MX13.2 | length 4.3
  Bottom Layer w0.254: MX13.2@291.108,138.708 291.22,138.596 294.952,138.596 D13.1@295.275,138.919
NetD14_1: D14.1 MX14.2 | length 4.7
  Bottom Layer w0.254: MX14.2@24.113,114.6 28.069,114.6 28.227,114.758 28.227,114.783 28.55,115.106 D14.1@28.575,115.106
NetD14_2: D14.2 D15.2 D16.2 D17.2 D18.2 D19.2 D20.2 D21.2 D22.2 D23.2 D24.2 D25.2 D26.2 D27.2 D28.2 D29.2 U2.12 | length 371.4
  Bottom Layer w0.254: D14.2@28.575,118.256 52.177,118.256 52.387,118.467 52.598,118.256 D16.2@71.438,118.256 ; D16.2@71.437,118.467 71.648,118.256 D17.2@90.488,118.256 D17.2@90.593,118.362 ; D17.2@90.487,118.467 D17.2@90.593,118.362 ; D17.2@90.698,118.467 D17.2@90.593,118.362 ; D18.2@109.327,118.467 D18.2@109.538,118.256 90.698,118.256 D17.2@90.593,118.362 ; D18.2@109.537,118.467 109.748,118.256 D19.2@128.588,118.256 ; D19.2@128.587,118.467 128.798,118.256 D20.2@147.638,118.256 ; D20.2@147.637,118.467 147.848,118.256 D21.2@166.688,118.256 ; D21.2@166.687,118.467 166.898,118.256 D22.2@185.738,118.256 ; D22.2@185.737,118.467 204.577,118.467 D23.2@204.788,118.256 ; D23.2@204.787,118.467 242.677,118.467 D25.2@242.888,118.256 ; D25.2@242.887,118.467 261.727,118.467 D26.2@261.938,118.256 262.148,118.467 280.777,118.467 D27.2@280.988,118.256 ; D27.2@280.987,118.467 286.94,118.467 287.711,119.238 293.313,119.238 294.084,118.467 309.563,118.467 310.158,118.467 311.348,117.276 311.348,114.3 322.659,102.989 345.876,102.989 349.4,106.513 349.4,116.729 348.196,117.933 347.986,117.933 D29.2@347.663,118.256 337.753,118.256 330.993,125.016 330.993,129.807 330.364,130.436 329.532,130.436 U2.12@329.523,130.445
NetD15_1: D15.1 MX15.2 | length 4.7
  Bottom Layer w0.254: MX15.2@47.925,114.6 51.881,114.6 52.039,114.758 52.039,114.783 52.363,115.106 D15.1@52.387,115.106
NetD16_1: D16.1 MX16.2 | length 4.5
  Bottom Layer w0.254: MX16.2@67.27,114.3 67.57,114.6 70.931,114.6 71.089,114.758 71.089,114.783 71.413,115.106 D16.1@71.438,115.106
NetD17_1: D17.1 MX17.2 | length 4.5
  Bottom Layer w0.254: MX17.2@86.32,114.3 86.62,114.6 89.981,114.6 90.139,114.758 90.139,114.783 90.463,115.106 D17.1@90.487,115.106
NetD18_1: D18.1 MX18.2 | length 4.5
  Bottom Layer w0.254: MX18.2@105.37,114.3 105.67,114.6 109.031,114.6 109.189,114.758 109.189,114.783 109.513,115.106 D18.1@109.537,115.106
NetD19_1: D19.1 MX19.2 | length 4.5
  Bottom Layer w0.254: MX19.2@124.42,114.895 124.715,114.6 128.081,114.6 128.239,114.758 128.239,114.783 128.563,115.106 D19.1@128.588,115.106
NetD20_1: D20.1 MX20.2 | length 4.7
  Bottom Layer w0.254: MX20.2@143.175,114.6 147.131,114.6 147.289,114.758 147.289,114.783 147.613,115.106 D20.1@147.637,115.106